# EAGLE board PCB PANEL GAT8 V1 (EAGLE 6.1)
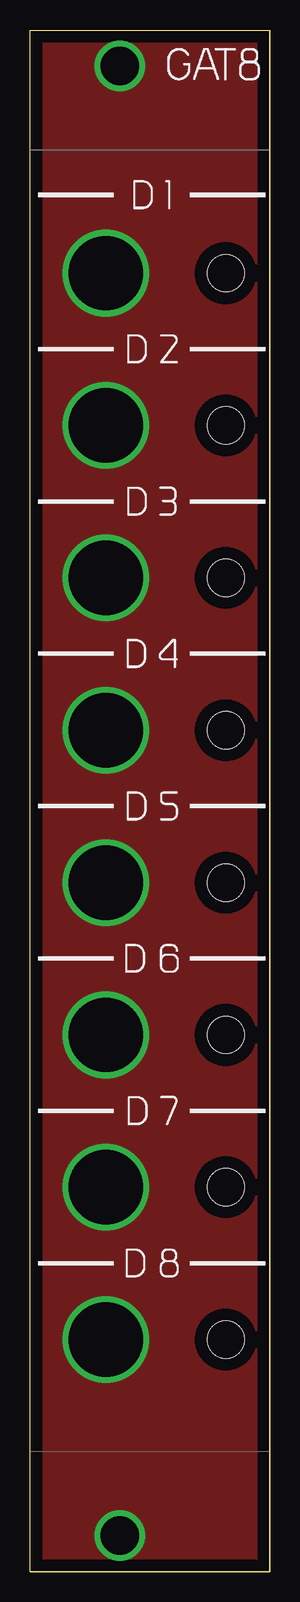
[diagram p0: board, top side]
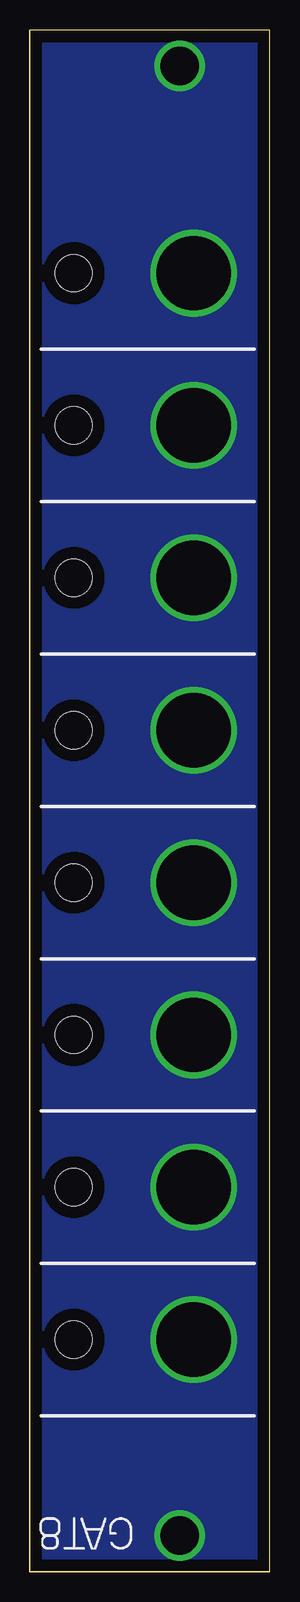
[diagram p1: board, bottom side, seen from below]

Size 20 x 128.5 mm. Coordinates in mm from the lower left corner, seen from the top.
Copper layers (1*16): Top 0.035mm / dielectric 1.5mm / Bottom 0.035mm
Design rules: minimum track width 10mil, minimum drill 24mil, track to track 8mil, track to pad 8mil, pad to pad 8mil, via to via 8mil, smd to smd 8mil, copper to edge 40mil, drill to drill 8mil, minimum pad ring 10mil, minimum via ring 8mil, stop-mask expansion 4mil, vias tented up to drill 0mil, thermal gap 10mil
Holes 3.1 mm at 16.35,19.33 16.35,32.03 16.35,44.73 16.35,57.43 16.35,70.13 16.35,82.83 16.35,95.53 16.35,108.23

## Placement (x,y rotation side)
E$1  [LABEL_GAT8_2]  0,0 0 top
E$2  [LABEL_GAT8-BACK]  0,0 0 top
PANEL_OUTLINE  [4HP_PANEL]  0,0 0 top

## Library data of the parts
E$1 E$2 = labels links
PANEL_OUTLINE = EURORACK PANELS

## Tracks (layer width: path | path; a pad name or v marks a point on that pad's centre or on a via)
GND  (via drill 3.2, 6.2)
  other vias: 6.35,19.33 6.35,32.03 6.35,44.73 6.35,57.43 6.35,70.13 6.35,82.83 6.35,95.53 6.35,108.23 7.5,3 7.5,125.5
  pour Bottom: 20.95,129.82 -1.27,129.82 -1.27,-0.99 21.59,-0.99
  pour Top: -1.27,129.82 20.95,129.82 21.59,-0.99 -1.27,-0.99